# EAGLE board K019 (EAGLE 6.3), part 1 of 6
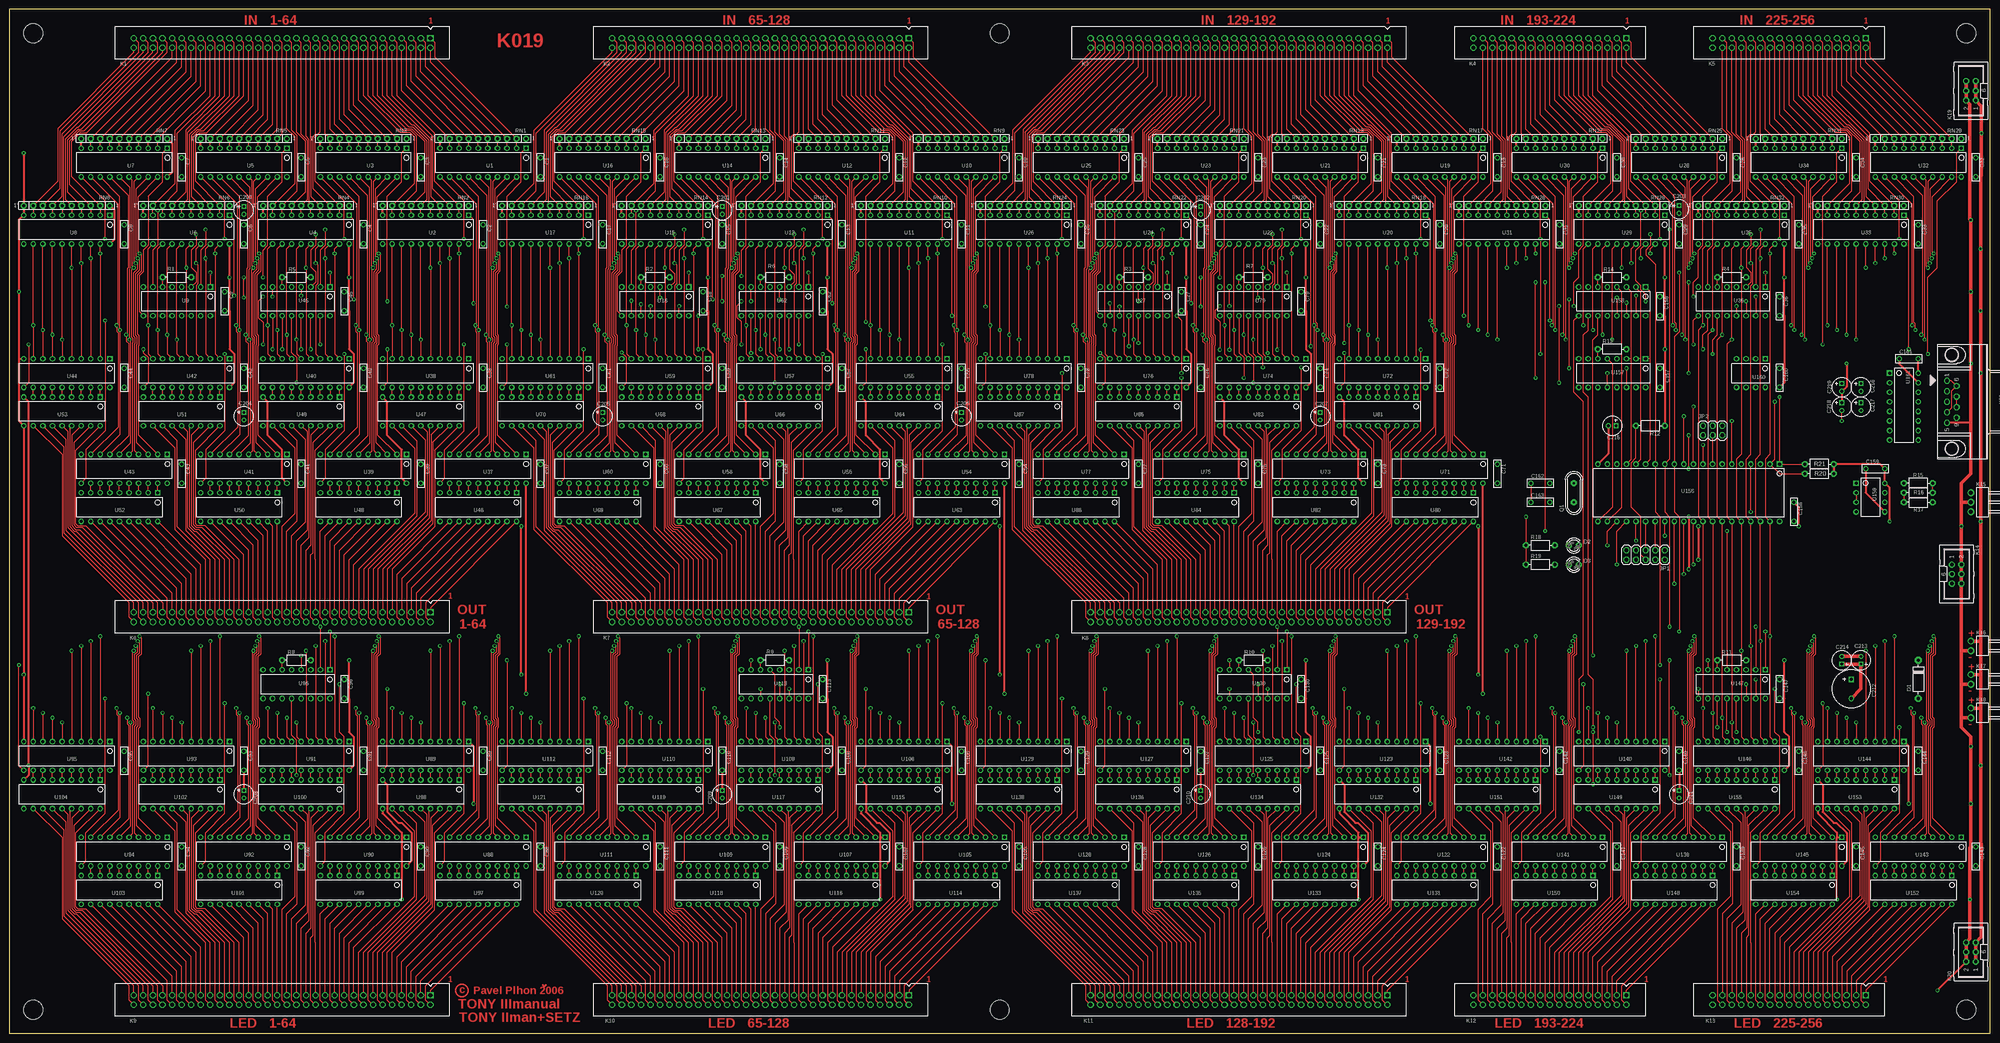
[diagram p0: board, top side]
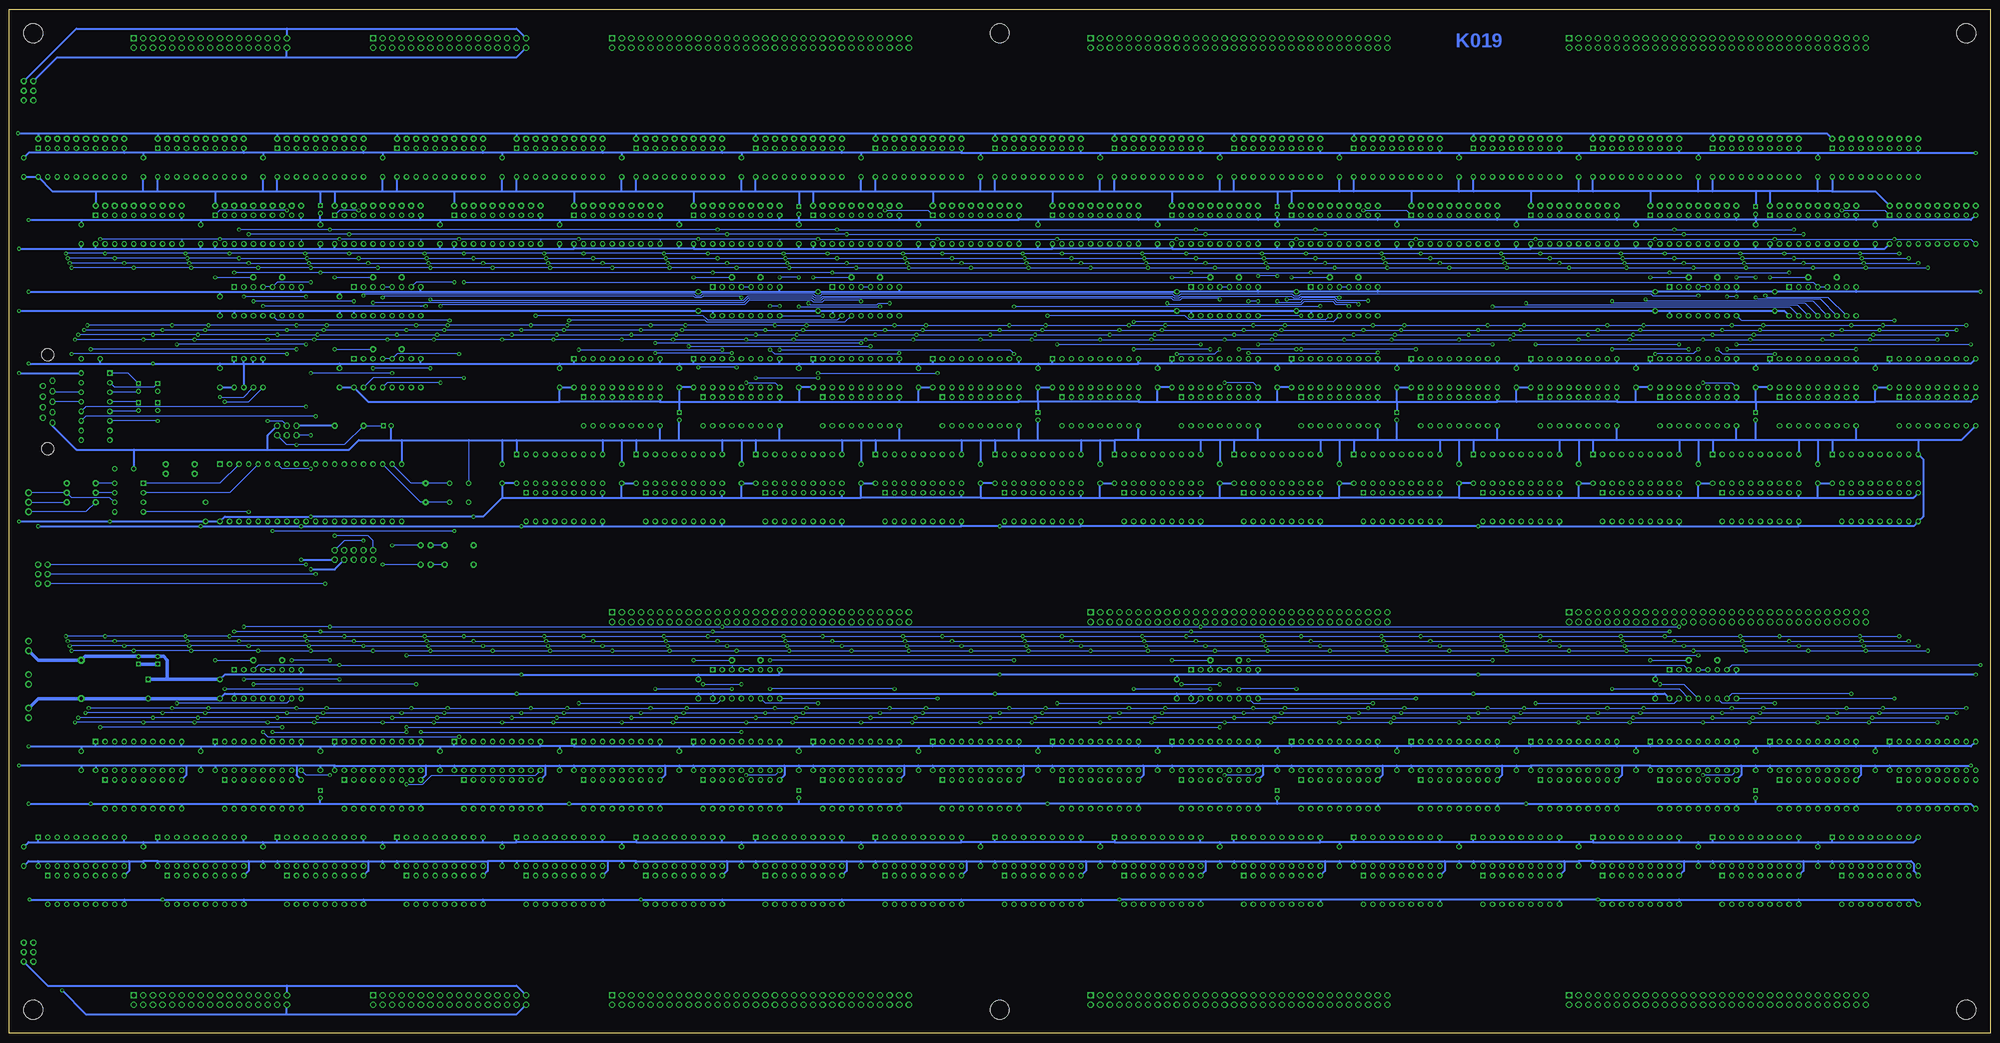
[diagram p1: board, bottom side, seen from below]

Size 525.78 x 271.78 mm. Coordinates in mm from the lower left corner, seen from the top.
Outline: 0,0 525.78,0 525.78,271.78 0,271.78 0,0
Copper layers (1*16): Top 0.035mm / dielectric 1.5mm / Bottom 0.035mm
Design rules "default": minimum track width 10mil, minimum drill 24mil, track to track 8mil, track to pad 8mil, pad to pad 8mil, via to via 8mil, smd to smd 8mil, copper to edge 40mil, drill to drill 8mil, minimum pad ring 10mil, minimum via ring 8mil, stop-mask expansion 4mil, vias tented up to drill 0mil, thermal gap 10mil
Holes 5.08 mm at 6.35,265.43 6.35,6.35 519.43,6.35 519.43,265.43 262.89,265.43 262.89,6.35

## Footprints (pad centres in the part's own frame; a part is rotated, then mirrored left to right if it is on the bottom)
C-5-2X8 = drill 0.813 pad 1.397: 1 0,0; 2 5.08,0
EC-2/5 = drill 0.711 pad 1.092: 1 1.016,0 | drill 0.711 pad 1.092 square: 2 -1.016,0
EC-5 = drill 0.813 pad 1.397 square: 1 -2.54,0 | drill 0.813 pad 1.397: 2 2.54,0
D-10 = drill 0.813 pad 1.778 octagon: 1 -5.08,0; 2 5.08,0
LED3 = drill 0.813 pad 1.6 octagon: A -1.27,0 | drill 0.813 pad 1.6: K 1.27,0
2X05 = drill 1.016 pad 1.6 octagon: 1 -5.08,-1.27; 2 -5.08,1.27; 3 -2.54,-1.27; 4 -2.54,1.27; 5 0,-1.27; 6 0,1.27; 7 2.54,-1.27; 8 2.54,1.27; 9 5.08,-1.27; 10 5.08,1.27
2X03 = drill 1.016 pad 1.6 octagon: 1 -2.54,-1.27; 2 -2.54,1.27; 3 0,-1.27; 4 0,1.27; 5 2.54,-1.27; 6 2.54,1.27
KON64 = drill 1.092 pad 1.6 square: 1 0,0 | drill 1.092 pad 1.6: 2 0,2.54; 3 2.54,0; 4 2.54,2.54; 5 5.08,0; 6 5.08,2.54; 7 7.62,0; 8 7.62,2.54; 9 10.16,0; 10 10.16,2.54; 11 12.7,0; 12 12.7,2.54; 13 15.24,0; 14 15.24,2.54; 15 17.78,0; 16 17.78,2.54; 17 20.32,0; 18 20.32,2.54; 19 22.86,0; 20 22.86,2.54; 21 25.4,0; 22 25.4,2.54; 23 27.94,0; 24 27.94,2.54; 25 30.48,0; 26 30.48,2.54; 27 33.02,0; 28 33.02,2.54; 29 35.56,0; 30 35.56,2.54; 31 38.1,0; 32 38.1,2.54; 33 40.64,0; 34 40.64,2.54; 35 43.18,0; 36 43.18,2.54; 37 45.72,0; 38 45.72,2.54; 39 48.26,0; 40 48.26,2.54; 41 50.8,0; 42 50.8,2.54; 43 53.34,0; 44 53.34,2.54; 45 55.88,0; 46 55.88,2.54; 47 58.42,0; 48 58.42,2.54; 49 60.96,0; 50 60.96,2.54; 51 63.5,0; 52 63.5,2.54; 53 66.04,0; 54 66.04,2.54; 55 68.58,0; 56 68.58,2.54; 57 71.12,0; 58 71.12,2.54; 59 73.66,0; 60 73.66,2.54; 61 76.2,0; 62 76.2,2.54; 63 78.74,0; 64 78.74,2.54
KON34 = drill 1.092 pad 1.6 square: 1 0,0 | drill 1.092 pad 1.6: 2 0,2.54; 3 2.54,0; 4 2.54,2.54; 5 5.08,0; 6 5.08,2.54; 7 7.62,0; 8 7.62,2.54; 9 10.16,0; 10 10.16,2.54; 11 12.7,0; 12 12.7,2.54; 13 15.24,0; 14 15.24,2.54; 15 17.78,0; 16 17.78,2.54; 17 20.32,0; 18 20.32,2.54; 19 22.86,0; 20 22.86,2.54; 21 25.4,0; 22 25.4,2.54; 23 27.94,0; 24 27.94,2.54; 25 30.48,0; 26 30.48,2.54; 27 33.02,0; 28 33.02,2.54; 29 35.56,0; 30 35.56,2.54; 31 38.1,0; 32 38.1,2.54; 33 40.64,0; 34 40.64,2.54
ML6 = drill 0.914 pad 1.6: 1 -2.54,-1.27 | drill 0.914 pad 1.6 octagon: 2 -2.54,1.27; 3 0,-1.27; 4 0,1.27; 5 2.54,-1.27; 6 2.54,1.27
PSH02-03 = drill 1.092 pad 1.803: 1 0,0; 2 2.54,0; 3 5.08,0
PSH02-02 = drill 1.092 pad 1.803: 1 0,0; 2 2.54,0
ML06 = drill 0.914 pad 1.6: 1 -2.54,-1.27 | drill 0.914 pad 1.6 octagon: 2 -2.54,1.27; 3 0,-1.27; 4 0,1.27; 5 2.54,-1.27; 6 2.54,1.27
D-09F/90 = drill 1.016 pad 1.575 octagon: 1 -5.588,-1.27; 2 -2.794,-1.27; 3 0,-1.27; 4 2.794,-1.27; 5 5.588,-1.27; 6 -4.191,1.27; 7 -1.397,1.27; 8 1.397,1.27; 9 4.191,1.27 | hole 3.2: 12.446,0; -12.446,0
QS = drill 0.61 pad 1.6 octagon: 1 -2.54,0; 2 2.54,0
R-7,5 = drill 0.813 pad 1.6 octagon: 1 -3.81,0; 2 3.81,0
G08R+ = drill 0.813 pad 1.6: 1 -10.16,0; 10 12.7,0 | drill 0.813 pad 1.6 octagon: 2 -7.62,0; 3 -5.08,0; 4 -2.54,0; 5 0,0; 6 2.54,0; 7 5.08,0; 8 7.62,0; 9 10.16,0
DIL20 = drill 0.813 pad 1.397 square: 1 0,0 | drill 0.813 pad 1.397: 2 2.54,0; 3 5.08,0; 4 7.62,0; 5 10.16,0; 6 12.7,0; 7 15.24,0; 8 17.78,0; 9 20.32,0; 10 22.86,0; 11 22.86,7.62; 12 20.32,7.62; 13 17.78,7.62; 14 15.24,7.62; 15 12.7,7.62; 16 10.16,7.62; 17 7.62,7.62; 18 5.08,7.62; 19 2.54,7.62; 20 0,7.62
DIL16 = drill 0.813 pad 1.397 square: 1 0,0 | drill 0.813 pad 1.397: 2 2.54,0; 3 5.08,0; 4 7.62,0; 5 10.16,0; 6 12.7,0; 7 15.24,0; 8 17.78,0; 9 17.78,7.62; 10 15.24,7.62; 11 12.7,7.62; 12 10.16,7.62; 13 7.62,7.62; 14 5.08,7.62; 15 2.54,7.62; 16 0,7.62
DIL18 = drill 0.813 pad 1.397 square: 1 0,0 | drill 0.813 pad 1.397: 2 2.54,0; 3 5.08,0; 4 7.62,0; 5 10.16,0; 6 12.7,0; 7 15.24,0; 8 17.78,0; 9 20.32,0; 10 20.32,7.62; 11 17.78,7.62; 12 15.24,7.62; 13 12.7,7.62; 14 10.16,7.62; 15 7.62,7.62; 16 5.08,7.62; 17 2.54,7.62; 18 0,7.62
DIL40 = drill 0.813 pad 1.397 square: 1 -24.13,-7.62 | drill 0.813 pad 1.397: 2 -21.59,-7.62; 3 -19.05,-7.62; 4 -16.51,-7.62; 5 -13.97,-7.62; 6 -11.43,-7.62; 7 -8.89,-7.62; 8 -6.35,-7.62; 9 -3.81,-7.62; 10 -1.27,-7.62; 11 1.27,-7.62; 12 3.81,-7.62; 13 6.35,-7.62; 14 8.89,-7.62; 15 11.43,-7.62; 16 13.97,-7.62; 17 16.51,-7.62; 18 19.05,-7.62; 19 21.59,-7.62; 20 24.13,-7.62; 21 24.13,7.62; 22 21.59,7.62; 23 19.05,7.62; 24 16.51,7.62; 25 13.97,7.62; 26 11.43,7.62; 27 8.89,7.62; 28 6.35,7.62; 29 3.81,7.62; 30 1.27,7.62; 31 -1.27,7.62; 32 -3.81,7.62; 33 -6.35,7.62; 34 -8.89,7.62; 35 -11.43,7.62; 36 -13.97,7.62; 37 -16.51,7.62; 38 -19.05,7.62; 39 -21.59,7.62; 40 -24.13,7.62
DIL-08 = drill 0.813 pad 1.397 square: 1 0,0 | drill 0.813 pad 1.397: 2 2.54,0; 3 5.08,0; 4 7.62,0; 5 7.62,7.62; 6 5.08,7.62; 7 2.54,7.62; 8 0,7.62

## Placement (x,y rotation side)
C1  100n  [C-5-2X8]  140.97,232.41 270 top
C2  100n  [C-5-2X8]  125.73,214.63 270 top
C3  100n  [C-5-2X8]  109.22,232.41 270 top
C4  100n  [C-5-2X8]  93.98,214.63 270 top
C5  100n  [C-5-2X8]  77.47,232.41 270 top
C6  100n  [C-5-2X8]  62.23,214.63 270 top
C7  100n  [C-5-2X8]  45.72,232.41 270 top
C8  100n  [C-5-2X8]  30.48,214.63 270 top
C9  100n  [C-5-2X8]  57.15,196.85 270 top
C10  100n  [C-5-2X8]  267.97,232.41 270 top
C11  100n  [C-5-2X8]  252.73,214.63 270 top
C12  100n  [C-5-2X8]  236.22,232.41 270 top
C13  100n  [C-5-2X8]  220.98,214.63 270 top
C14  100n  [C-5-2X8]  204.47,232.41 270 top
C15  100n  [C-5-2X8]  189.23,214.63 270 top
C16  100n  [C-5-2X8]  172.72,232.41 270 top
C17  100n  [C-5-2X8]  157.48,214.63 270 top
C18  100n  [C-5-2X8]  184.15,196.85 270 top
C19  100n  [C-5-2X8]  394.97,232.41 270 top
C20  100n  [C-5-2X8]  379.73,214.63 270 top
C21  100n  [C-5-2X8]  363.22,232.41 270 top
C22  100n  [C-5-2X8]  347.98,214.63 270 top
C23  100n  [C-5-2X8]  331.47,232.41 270 top
C24  100n  [C-5-2X8]  316.23,214.63 270 top
C25  100n  [C-5-2X8]  299.72,232.41 270 top
C26  100n  [C-5-2X8]  284.48,214.63 270 top
C27  100n  [C-5-2X8]  311.15,196.85 270 top
C28  100n  [C-5-2X8]  458.47,232.41 270 top
C29  100n  [C-5-2X8]  443.23,214.63 270 top
C30  100n  [C-5-2X8]  426.72,232.41 270 top
C31  100n  [C-5-2X8]  411.48,214.63 270 top
C32  100n  [C-5-2X8]  521.97,232.41 270 top
C33  100n  [C-5-2X8]  506.73,214.63 270 top
C34  100n  [C-5-2X8]  490.22,232.41 270 top
C35  100n  [C-5-2X8]  474.98,214.63 270 top
C36  100n  [C-5-2X8]  469.9,195.58 270 top
C37  100n  [C-5-2X8]  140.97,151.13 270 top
C38  100n  [C-5-2X8]  125.73,176.53 270 top
C39  100n  [C-5-2X8]  109.22,151.13 270 top
C40  100n  [C-5-2X8]  93.98,176.53 270 top
C41  100n  [C-5-2X8]  77.47,151.13 270 top
C42  100n  [C-5-2X8]  62.23,176.53 270 top
C43  100n  [C-5-2X8]  45.72,151.13 270 top
C44  100n  [C-5-2X8]  30.48,176.53 270 top
C45  100n  [C-5-2X8]  88.9,196.85 270 top
C54  100n  [C-5-2X8]  267.97,151.13 270 top
C55  100n  [C-5-2X8]  252.73,176.53 270 top
C56  100n  [C-5-2X8]  236.22,151.13 270 top
C57  100n  [C-5-2X8]  220.98,176.53 270 top
C58  100n  [C-5-2X8]  204.47,151.13 270 top
C59  100n  [C-5-2X8]  189.23,176.53 270 top
C60  100n  [C-5-2X8]  172.72,151.13 270 top
C61  100n  [C-5-2X8]  157.48,176.53 270 top
C62  100n  [C-5-2X8]  215.9,196.85 270 top
C71  100n  [C-5-2X8]  394.97,151.13 270 top
C72  100n  [C-5-2X8]  379.73,176.53 270 top
C73  100n  [C-5-2X8]  363.22,151.13 270 top
C74  100n  [C-5-2X8]  347.98,176.53 270 top
C75  100n  [C-5-2X8]  331.47,151.13 270 top
C76  100n  [C-5-2X8]  316.23,176.53 270 top
C77  100n  [C-5-2X8]  299.72,151.13 270 top
C78  100n  [C-5-2X8]  284.48,176.53 270 top
C79  100n  [C-5-2X8]  342.9,196.85 270 top
C88  100n  [C-5-2X8]  140.97,49.53 270 top
C89  100n  [C-5-2X8]  125.73,74.93 270 top
C90  100n  [C-5-2X8]  109.22,49.53 270 top
C91  100n  [C-5-2X8]  93.98,74.93 270 top
C92  100n  [C-5-2X8]  77.47,49.53 270 top
C93  100n  [C-5-2X8]  62.23,74.93 270 top
C94  100n  [C-5-2X8]  45.72,49.53 270 top
C95  100n  [C-5-2X8]  30.48,74.93 270 top
C96  100n  [C-5-2X8]  88.9,93.98 270 top
C105  100n  [C-5-2X8]  267.97,49.53 270 top
C106  100n  [C-5-2X8]  252.73,74.93 270 top
C107  100n  [C-5-2X8]  236.22,49.53 270 top
C108  100n  [C-5-2X8]  220.98,74.93 270 top
C109  100n  [C-5-2X8]  204.47,49.53 270 top
C110  100n  [C-5-2X8]  189.23,74.93 270 top
C111  100n  [C-5-2X8]  172.72,49.53 270 top
C112  100n  [C-5-2X8]  157.48,74.93 270 top
C113  100n  [C-5-2X8]  215.9,93.98 270 top
C122  100n  [C-5-2X8]  394.97,49.53 270 top
C123  100n  [C-5-2X8]  379.73,74.93 270 top
C124  100n  [C-5-2X8]  363.22,49.53 270 top
C125  100n  [C-5-2X8]  347.98,74.93 270 top
C126  100n  [C-5-2X8]  331.47,49.53 270 top
C127  100n  [C-5-2X8]  316.23,74.93 270 top
C128  100n  [C-5-2X8]  299.72,49.53 270 top
C129  100n  [C-5-2X8]  284.48,74.93 270 top
C130  100n  [C-5-2X8]  342.9,93.98 270 top
C139  100n  [C-5-2X8]  458.47,49.53 270 top
C140  100n  [C-5-2X8]  443.23,74.93 270 top
C141  100n  [C-5-2X8]  426.72,49.53 270 top
C142  100n  [C-5-2X8]  411.48,74.93 270 top
C143  100n  [C-5-2X8]  521.97,49.53 270 top
C144  100n  [C-5-2X8]  506.73,74.93 270 top
C145  100n  [C-5-2X8]  490.22,49.53 270 top
C146  100n  [C-5-2X8]  474.98,74.93 270 top
C147  100n  [C-5-2X8]  469.9,93.98 270 top
C156  100n  [C-5-2X8]  473.71,140.97 270 top
C157  100n  [C-5-2X8]  438.15,176.53 270 top
C158  100n  [C-5-2X8]  438.15,195.58 270 top
C159  100n  [C-5-2X8]  492.76,149.86 0 top
C160  100n  [C-5-2X8]  469.9,176.53 270 top
C161  100n  [C-5-2X8]  501.65,179.07 0 top
C162  22  [C-5-2X8]  403.86,146.05 0 top
C163  22  [C-5-2X8]  403.86,140.97 0 top
C200  22M  [EC-2/5]  62.23,218.44 270 top
C201  22M  [EC-2/5]  189.23,218.44 270 top
C202  22M  [EC-2/5]  316.23,218.44 270 top
C203  22M  [EC-2/5]  443.23,218.69 270 top
C204  22M  [EC-2/5]  62.23,163.83 270 top
C205  22M  [EC-2/5]  157.48,163.83 270 top
C206  22M  [EC-2/5]  252.73,163.83 270 top
C207  22M  [EC-2/5]  347.98,163.83 270 top
C208  22M  [EC-2/5]  62.23,63.5 270 top
C209  22M  [EC-2/5]  189.23,63.5 270 top
C210  22M  [EC-2/5]  316.23,63.5 270 top
C211  22M  [EC-2/5]  443.23,63.5 270 top
C212  220M  [EC-5]  488.95,91.44 270 top
C213  22M  [EC-2/5]  491.49,99.06 90 top
C214  22M  [EC-2/5]  486.41,99.06 90 top
C215  2M2  [EC-2/5]  425.45,161.29 180 top
C216  2M2  [EC-2/5]  491.49,171.45 270 top
C217  2M2  [EC-2/5]  491.49,166.37 270 top
C218  2M2  [EC-2/5]  486.41,166.37 270 top
C219  2M2  [EC-2/5]  486.41,171.45 270 top
D1  5V6  [D-10]  506.73,93.98 90 top
D2  LEDG  [LED3]  415.29,129.54 0 top
D3  LEDR  [LED3]  415.29,124.46 0 top
JP1  JTAG  [2X05]  434.34,127 180 top
JP2  ISP  [2X03]  452.12,160.02 0 top
K1  KON64  [KON64]  111.76,264.16 180 top
K2  KON64  [KON64]  238.76,264.16 180 top
K3  KON64  [KON64]  365.76,264.16 180 top
K4  KON34  [KON34]  429.26,264.16 180 top
K5  KON34  [KON34]  492.76,264.16 180 top
K6  KON64  [KON64]  111.76,111.76 180 top
K7  KON64  [KON64]  238.76,111.76 180 top
K8  KON64  [KON64]  365.76,111.76 180 top
K9  KON64  [KON64]  111.76,10.16 180 top
K10  KON64  [KON64]  238.76,10.16 180 top
K11  KON64  [KON64]  365.76,10.16 180 top
K12  KON34  [KON34]  429.26,10.16 180 top
K13  KON34  [KON34]  492.76,10.16 180 top
K14  KLIC  [ML6]  516.89,121.92 270 top
K15  PSH02-03W  [PSH02-03]  520.7,143.51 270 top
K16  PSH02-02W  [PSH02-02]  520.7,104.14 270 top
K17  PSH02-02W  [PSH02-02]  520.7,95.25 270 top
K18  PSH02-02W  [PSH02-02]  520.7,86.36 270 top
K19  PWR  [ML06]  520.7,250.19 90 top
K20  PWR  [ML06]  520.7,21.59 90 top
K21  RS232  [D-09F/90]  515.62,167.64 270 top
Q1  14.745MHz  [QS]  415.29,143.51 90 top
R1  1k  [R-7,5]  44.45,200.66 0 top
R2  1k  [R-7,5]  171.45,200.66 0 top
R3  1k  [R-7,5]  298.45,200.66 0 top
R4  1k  [R-7,5]  457.2,200.66 0 top
R5  1k  [R-7,5]  76.2,200.66 180 top
R6  1k  [R-7,5]  203.2,200.66 180 top
R7  1k  [R-7,5]  330.2,200.66 180 top
R8  1k  [R-7,5]  76.2,99.06 180 top
R9  1k  [R-7,5]  203.2,99.06 180 top
R10  1k  [R-7,5]  330.2,99.06 180 top
R11  1k  [R-7,5]  457.2,99.06 180 top
R12  10k  [R-7,5]  435.61,161.29 180 top
R13  1k  [R-7,5]  425.45,181.61 180 top
R14  1k  [R-7,5]  425.45,200.66 180 top
R15  2k2  [R-7,5]  506.73,146.05 180 top
R16  120  [R-7,5]  506.73,143.51 0 top
R17  2k2  [R-7,5]  506.73,140.97 180 top
R18  1k  [R-7,5]  406.4,129.54 0 top
R19  1k  [R-7,5]  406.4,124.46 0 top
R20  4k7  [R-7,5]  480.44,148.59 180 top
R21  4k7  [R-7,5]  480.44,151.13 180 top
RN1  8x47k  [G08R+]  127,237.49 180 top
RN2  8x47k  [G08R+]  111.76,219.71 180 top
RN3  8x47k  [G08R+]  95.25,237.49 180 top
RN4  8x47k  [G08R+]  80.01,219.71 180 top
RN5  8x47k  [G08R+]  63.5,237.49 180 top
RN6  8x47k  [G08R+]  48.26,219.71 180 top
RN7  8x47k  [G08R+]  31.75,237.49 180 top
RN8  8x47k  [G08R+]  16.51,219.71 180 top
RN9  8x47k  [G08R+]  254,237.49 180 top
RN10  8x47k  [G08R+]  238.76,219.71 180 top
RN11  8x47k  [G08R+]  222.25,237.49 180 top
RN12  8x47k  [G08R+]  207.01,219.71 180 top
RN13  8x47k  [G08R+]  190.5,237.49 180 top
RN14  8x47k  [G08R+]  175.26,219.71 180 top
RN15  8x47k  [G08R+]  158.75,237.49 180 top
RN16  8x47k  [G08R+]  143.51,219.71 180 top
RN17  8x47k  [G08R+]  381,237.49 180 top
RN18  8x47k  [G08R+]  365.76,219.71 180 top
RN19  8x47k  [G08R+]  349.25,237.49 180 top
RN20  8x47k  [G08R+]  334.01,219.71 180 top
RN21  8x47k  [G08R+]  317.5,237.49 180 top
RN22  8x47k  [G08R+]  302.26,219.71 180 top
RN23  8x47k  [G08R+]  285.75,237.49 180 top
RN24  8x47k  [G08R+]  270.51,219.71 180 top
RN25  8x47k  [G08R+]  444.5,237.49 180 top
RN26  8x47k  [G08R+]  429.26,219.71 180 top
RN27  8x47k  [G08R+]  412.75,237.49 180 top
RN28  8x47k  [G08R+]  397.51,219.71 180 top
RN29  8x47k  [G08R+]  508,237.49 180 top
RN30  8x47k  [G08R+]  492.76,219.71 180 top
RN31  8x47k  [G08R+]  476.25,237.49 180 top
RN32  8x47k  [G08R+]  461.01,219.71 180 top
U1  74HC573  [DIL20]  137.16,234.95 180 top
U2  74HC573  [DIL20]  121.92,217.17 180 top
U3  74HC573  [DIL20]  105.41,234.95 180 top
U4  74HC573  [DIL20]  90.17,217.17 180 top
U5  74HC573  [DIL20]  73.66,234.95 180 top
U6  74AC573  [DIL20]  58.42,217.17 180 top
U7  74HC573  [DIL20]  41.91,234.95 180 top
U8  74HC573  [DIL20]  26.67,217.17 180 top
U9  74AC138  [DIL16]  53.34,198.12 180 top
U10  74HC573  [DIL20]  264.16,234.95 180 top
U11  74HC573  [DIL20]  248.92,217.17 180 top
U12  74HC573  [DIL20]  232.41,234.95 180 top
U13  74HC573  [DIL20]  217.17,217.17 180 top
U14  74HC573  [DIL20]  200.66,234.95 180 top
U15  74AC573  [DIL20]  185.42,217.17 180 top
U16  74HC573  [DIL20]  168.91,234.95 180 top
U17  74HC573  [DIL20]  153.67,217.17 180 top
U18  74AC138  [DIL16]  180.34,198.12 180 top
U19  74HC573  [DIL20]  391.16,234.95 180 top
U20  74HC573  [DIL20]  375.92,217.17 180 top
U21  74HC573  [DIL20]  359.41,234.95 180 top
U22  74HC573  [DIL20]  344.17,217.17 180 top
U23  74HC573  [DIL20]  327.66,234.95 180 top
U24  74AC573  [DIL20]  312.42,217.17 180 top
U25  74HC573  [DIL20]  295.91,234.95 180 top
U26  74HC573  [DIL20]  280.67,217.17 180 top
U27  74AC138  [DIL16]  307.34,198.12 180 top
U28  74HC573  [DIL20]  454.66,234.95 180 top
U29  74HC573  [DIL20]  439.42,217.17 180 top
U30  74HC573  [DIL20]  422.91,234.95 180 top
U31  74HC573  [DIL20]  407.67,217.17 180 top
U32  74HC573  [DIL20]  518.16,234.95 180 top
U33  74AC573  [DIL20]  502.92,217.17 180 top
U34  74HC573  [DIL20]  486.41,234.95 180 top
U35  74HC573  [DIL20]  471.17,217.17 180 top
U36  74AC138  [DIL16]  466.09,198.12 180 top
U37  74HC574  [DIL20]  137.16,153.67 180 top
U38  74HC574  [DIL20]  121.92,179.07 180 top
U39  74HC574  [DIL20]  105.41,153.67 180 top
U40  74HC574  [DIL20]  90.17,179.07 180 top
U41  74HC574  [DIL20]  73.66,153.67 180 top
U42  74HC574  [DIL20]  58.42,179.07 180 top
U43  74HC574  [DIL20]  41.91,153.67 180 top
U44  74HC574  [DIL20]  26.67,179.07 180 top
U45  74HC138  [DIL16]  85.09,198.12 180 top
U46  TD62783F  [DIL18]  134.62,143.51 180 top
U47  TD62783F  [DIL18]  119.38,168.91 180 top
U48  TD62783F  [DIL18]  102.87,143.51 180 top
U49  TD62783F  [DIL18]  87.63,168.91 180 top
U50  TD62783F  [DIL18]  71.12,143.51 180 top
U51  TD62783F  [DIL18]  55.88,168.91 180 top
U52  TD62783F  [DIL18]  39.37,143.51 180 top
U53  TD62783F  [DIL18]  24.13,168.91 180 top
U54  74HC574  [DIL20]  264.16,153.67 180 top
U55  74HC574  [DIL20]  248.92,179.07 180 top
U56  74HC574  [DIL20]  232.41,153.67 180 top
U57  74HC574  [DIL20]  217.17,179.07 180 top
U58  74HC574  [DIL20]  200.66,153.67 180 top
U59  74HC574  [DIL20]  185.42,179.07 180 top
U60  74HC574  [DIL20]  168.91,153.67 180 top
U61  74HC574  [DIL20]  153.67,179.07 180 top
U62  74HC138  [DIL16]  212.09,198.12 180 top
U63  TD62783F  [DIL18]  261.62,143.51 180 top
U64  TD62783F  [DIL18]  246.38,168.91 180 top
U65  TD62783F  [DIL18]  229.87,143.51 180 top
U66  TD62783F  [DIL18]  214.63,168.91 180 top
U67  TD62783F  [DIL18]  198.12,143.51 180 top
U68  TD62783F  [DIL18]  182.88,168.91 180 top
U69  TD62783F  [DIL18]  166.37,143.51 180 top
U70  TD62783F  [DIL18]  151.13,168.91 180 top
U71  74HC574  [DIL20]  391.16,153.67 180 top
U72  74HC574  [DIL20]  375.92,179.07 180 top
U73  74HC574  [DIL20]  359.41,153.67 180 top
U74  74HC574  [DIL20]  344.17,179.07 180 top
U75  74HC574  [DIL20]  327.66,153.67 180 top
U76  74HC574  [DIL20]  312.42,179.07 180 top
U77  74HC574  [DIL20]  295.91,153.67 180 top
U78  74HC574  [DIL20]  280.67,179.07 180 top
U79  74HC138  [DIL16]  339.09,198.12 180 top
U80  TD62783F  [DIL18]  388.62,143.51 180 top
U81  TD62783F  [DIL18]  373.38,168.91 180 top
U82  TD62783F  [DIL18]  356.87,143.51 180 top
U83  TD62783F  [DIL18]  341.63,168.91 180 top
U84  TD62783F  [DIL18]  325.12,143.51 180 top
U85  TD62783F  [DIL18]  309.88,168.91 180 top
U86  TD62783F  [DIL18]  293.37,143.51 180 top
U87  TD62783F  [DIL18]  278.13,168.91 180 top
U88  74HC574  [DIL20]  137.16,52.07 180 top
U89  74HC574  [DIL20]  121.92,77.47 180 top
U90  74HC574  [DIL20]  105.41,52.07 180 top
U91  74HC574  [DIL20]  90.17,77.47 180 top
U92  74HC574  [DIL20]  73.66,52.07 180 top
U93  74HC574  [DIL20]  58.42,77.47 180 top
U94  74HC574  [DIL20]  41.91,52.07 180 top
U95  74HC574  [DIL20]  26.67,77.47 180 top
U96  74HC138  [DIL16]  85.09,96.52 180 top
U97  TD62783F  [DIL18]  134.62,41.91 180 top
U98  TD62783F  [DIL18]  119.38,67.31 180 top
U99  TD62783F  [DIL18]  102.87,41.91 180 top
U100  TD62783F  [DIL18]  87.63,67.31 180 top
U101  TD62783F  [DIL18]  71.12,41.91 180 top
U102  TD62783F  [DIL18]  55.88,67.31 180 top
U103  TD62783F  [DIL18]  39.37,41.91 180 top
U104  TD62783F  [DIL18]  24.13,67.31 180 top
U105  74HC574  [DIL20]  264.16,52.07 180 top
U106  74HC574  [DIL20]  248.92,77.47 180 top
U107  74HC574  [DIL20]  232.41,52.07 180 top
U108  74HC574  [DIL20]  217.17,77.47 180 top
U109  74HC574  [DIL20]  200.66,52.07 180 top
U110  74HC574  [DIL20]  185.42,77.47 180 top
U111  74HC574  [DIL20]  168.91,52.07 180 top
U112  74HC574  [DIL20]  153.67,77.47 180 top
U113  74HC138  [DIL16]  212.09,96.52 180 top
U114  TD62783F  [DIL18]  261.62,41.91 180 top
U115  TD62783F  [DIL18]  246.38,67.31 180 top
U116  TD62783F  [DIL18]  229.87,41.91 180 top
U117  TD62783F  [DIL18]  214.63,67.31 180 top
U118  TD62783F  [DIL18]  198.12,41.91 180 top
U119  TD62783F  [DIL18]  182.88,67.31 180 top
U120  TD62783F  [DIL18]  166.37,41.91 180 top
U121  TD62783F  [DIL18]  151.13,67.31 180 top
U122  74HC574  [DIL20]  391.16,52.07 180 top
U123  74HC574  [DIL20]  375.92,77.47 180 top
U124  74HC574  [DIL20]  359.41,52.07 180 top
U125  74HC574  [DIL20]  344.17,77.47 180 top
U126  74HC574  [DIL20]  327.66,52.07 180 top
U127  74HC574  [DIL20]  312.42,77.47 180 top
U128  74HC574  [DIL20]  295.91,52.07 180 top
U129  74HC574  [DIL20]  280.67,77.47 180 top
U130  74HC138  [DIL16]  339.09,96.52 180 top
U131  TD62783F  [DIL18]  388.62,41.91 180 top
U132  TD62783F  [DIL18]  373.38,67.31 180 top
U133  TD62783F  [DIL18]  356.87,41.91 180 top
U134  TD62783F  [DIL18]  341.63,67.31 180 top
U135  TD62783F  [DIL18]  325.12,41.91 180 top
U136  TD62783F  [DIL18]  309.88,67.31 180 top
U137  TD62783F  [DIL18]  293.37,41.91 180 top
U138  TD62783F  [DIL18]  278.13,67.31 180 top
U139  74HC574  [DIL20]  454.66,52.07 180 top
U140  74HC574  [DIL20]  439.42,77.47 180 top
U141  74HC574  [DIL20]  422.91,52.07 180 top
U142  74HC574  [DIL20]  407.67,77.47 180 top
U143  74HC574  [DIL20]  518.16,52.07 180 top
U144  74HC574  [DIL20]  502.92,77.47 180 top
U145  74HC574  [DIL20]  486.41,52.07 180 top
U146  74HC574  [DIL20]  471.17,77.47 180 top
U147  74HC138  [DIL16]  466.09,96.52 180 top
U148  TD62783F  [DIL18]  452.12,41.91 180 top
U149  TD62783F  [DIL18]  436.88,67.31 180 top
U150  TD62783F  [DIL18]  420.37,41.91 180 top
U151  TD62783F  [DIL18]  405.13,67.31 180 top
U152  TD62783F  [DIL18]  515.62,41.91 180 top
U153  TD62783F  [DIL18]  500.38,67.31 180 top
U154  TD62783F  [DIL18]  483.87,41.91 180 top
U155  TD62783F  [DIL18]  468.63,67.31 180 top
U156  MEGA162  [DIL40]  445.77,143.51 180 top
U157  74HC138  [DIL16]  434.34,179.07 180 top
U158  74HC138  [DIL16]  434.34,198.12 180 top
U159  SP485  [DIL-08]  490.22,146.05 270 top
U160  24C64  [DIL-08]  466.09,179.07 180 top
U161  MAX232  [DIL16]  499.11,175.26 270 top

## Library data of the parts
C1-C45 C54-C62 C71-C79 C88-C96 C105-C113 C122-C130 C139-C147 C156-C163 R6-R11 = AUTOMAT
C200-C219 R20 R21 U63-U70 U80-U87 U114-U121 U131-U138 U148-U155 U159 U160 = RIZENI
D1 R1-R5 R12-R19 = DISCRETE
D2 D3 = led
JP1 JP2 = pinhead
K1-K13 K15-K18 U1-U9 U37-U53 U97-U104 U156-U158 U161 = kac
K14 K19 K20 = con-ml
K21 = CONNECT
Q1 = special
RN1-RN32 = kacb
U10-U36 U54-U62 U71-U79 U88-U96 U105-U113 U122-U130 U139-U147 = CENTRALA